# EAGLE board BigBus_Error (EAGLE 7.7.0)
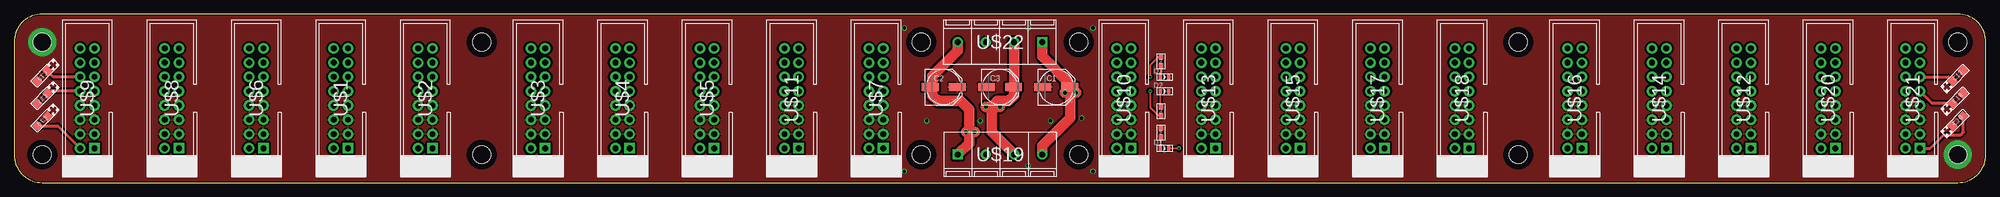
[diagram p0: board, top side]
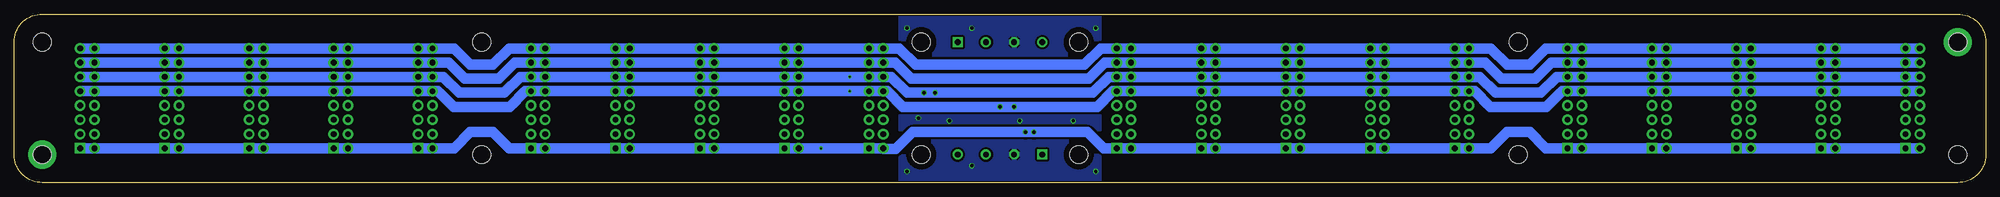
[diagram p1: board, bottom side, seen from below]

Size 350 x 30 mm. Coordinates in mm from the lower left corner, seen from the top.
Outline: 0,25 0,5 arc90 5,0 345,0 arc90 350,5 350,25 arc90 345,30 5,30 arc90 0,25
Copper layers (1*16): Top 0.035mm / dielectric 1.5mm / Bottom 0.035mm
Design rules "dirt_cheap_dirty_boards.v1": minimum track width 5mil, minimum drill 12mil, track to track 5mil, track to pad 5mil, pad to pad 5mil, via to via 5mil, smd to smd 0mil, copper to edge 10mil, drill to drill 10mil, minimum pad ring 10mil, minimum via ring 6mil, stop-mask expansion 2mil, vias tented up to drill 25mil, thermal gap 10mil
Net classes: 0 default: width 0.254 mm, clearance 0.381 mm; 1 Powertrace: width 1.87 mm
Holes 3.2 mm at 5,25 345,5

## Footprints (pad centres in the part's own frame; a part is rotated, then mirrored left to right if it is on the bottom)
PANASONIC_D = smd 3 x 1.4: + 2.4,0; - -2.4,0
CASE-A_3216 = smd 1.27 x 1.27: + -1.27,0; - 1.27,0
LED0603 = smd 0.762 x 0.889: + -0.762,0; - 0.762,0
3.2-NOMARKINGS-SMALLSAFEZONE = hole 3.2: 0,0
R0603 = smd 0.889 x 0.889: 1 -0.762,0; 2 0.762,0
POWER_16_SHROUDED_NOTEXT = drill 1.016 pad 1.88 square: 1 -8.89,-1.27 | drill 1.016 pad 1.88: 2 -8.89,1.27; 3 -6.35,-1.27; 4 -6.35,1.27; 5 -3.81,-1.27; 6 -3.81,1.27; 7 -1.27,-1.27; 8 -1.27,1.27; 9 1.27,-1.27; 10 1.27,1.27; 11 3.81,-1.27; 12 3.81,1.27; 13 6.35,-1.27; 14 6.35,1.27; 15 8.89,-1.27; 16 8.89,1.27
4PIN5MM = drill 1.016 pad 1.778 square: 1 -7.5,0 | drill 1.016 pad 1.778: 2 -2.5,0; 3 2.5,0; 4 7.5,0

## Placement (x,y rotation side)
C1  10uF  [PANASONIC_D]  185,17 0 top
C2  10uF  [PANASONIC_D]  165,17 0 top
C3  10uF  [PANASONIC_D]  175,17 0 top
C10  10uF  [CASE-A_3216]  5,11 225 top
C13  10uF  [CASE-A_3216]  345,19 45 top
C15  10uF  [CASE-A_3216]  5,19 225 top
C18  10uF  [CASE-A_3216]  345,15 45 top
C20  10uF  [CASE-A_3216]  345,11 45 top
C27  10uF  [CASE-A_3216]  5,15 225 top
D1  yellow  [LED0603]  204.21,6.1 0 top
D2  yellow  [LED0603]  204.21,16.26 0 top
D3  yellow  [LED0603]  204.21,18.8 0 top
H1  MOUNT-HOLE  [3.2-NOMARKINGS-SMALLSAFEZONE]  5,5 0 top
H2  MOUNT-HOLE  [3.2-NOMARKINGS-SMALLSAFEZONE]  267,5 0 top
H4  MOUNT-HOLE  [3.2-NOMARKINGS-SMALLSAFEZONE]  267,25 0 top
H5  MOUNT-HOLE  [3.2-NOMARKINGS-SMALLSAFEZONE]  161,25 0 top
H6  MOUNT-HOLE  [3.2-NOMARKINGS-SMALLSAFEZONE]  161,5 0 top
H7  MOUNT-HOLE  [3.2-NOMARKINGS-SMALLSAFEZONE]  83,25 0 top
H8  MOUNT-HOLE  [3.2-NOMARKINGS-SMALLSAFEZONE]  83,5 0 top
H9  MOUNT-HOLE  [3.2-NOMARKINGS-SMALLSAFEZONE]  345,25 0 top
H11  MOUNT-HOLE  [3.2-NOMARKINGS-SMALLSAFEZONE]  189,25 0 top
H12  MOUNT-HOLE  [3.2-NOMARKINGS-SMALLSAFEZONE]  189,5 0 top
R1  680  [R0603]  203.57,8.89 270 top
R2  680  [R0603]  203.57,12.7 90 top
R3  220  [R0603]  203.57,21.59 270 top
U$1  POWER_SHROUDED_NOTEXT  [POWER_16_SHROUDED_NOTEXT]  58,15 90 top
U$2  POWER_SHROUDED_NOTEXT  [POWER_16_SHROUDED_NOTEXT]  73,15 90 top
U$3  POWER_SHROUDED_NOTEXT  [POWER_16_SHROUDED_NOTEXT]  93,15 90 top
U$4  POWER_SHROUDED_NOTEXT  [POWER_16_SHROUDED_NOTEXT]  108,15 90 top
U$5  POWER_SHROUDED_NOTEXT  [POWER_16_SHROUDED_NOTEXT]  123,15 90 top
U$6  POWER_SHROUDED_NOTEXT  [POWER_16_SHROUDED_NOTEXT]  43,15 90 top
U$7  POWER_SHROUDED_NOTEXT  [POWER_16_SHROUDED_NOTEXT]  153,15 90 top
U$8  POWER_SHROUDED_NOTEXT  [POWER_16_SHROUDED_NOTEXT]  28,15 90 top
U$9  POWER_SHROUDED_NOTEXT  [POWER_16_SHROUDED_NOTEXT]  13,15 90 top
U$10  POWER_SHROUDED_NOTEXT  [POWER_16_SHROUDED_NOTEXT]  197,15 90 top
U$11  POWER_SHROUDED_NOTEXT  [POWER_16_SHROUDED_NOTEXT]  138,15 90 top
U$12  POWER_SHROUDED_NOTEXT  [POWER_16_SHROUDED_NOTEXT]  307,15 90 top
U$13  POWER_SHROUDED_NOTEXT  [POWER_16_SHROUDED_NOTEXT]  212,15 90 top
U$14  POWER_SHROUDED_NOTEXT  [POWER_16_SHROUDED_NOTEXT]  292,15 90 top
U$15  POWER_SHROUDED_NOTEXT  [POWER_16_SHROUDED_NOTEXT]  227,15 90 top
U$16  POWER_SHROUDED_NOTEXT  [POWER_16_SHROUDED_NOTEXT]  277,15 90 top
U$17  POWER_SHROUDED_NOTEXT  [POWER_16_SHROUDED_NOTEXT]  242,15 90 top
U$18  POWER_SHROUDED_NOTEXT  [POWER_16_SHROUDED_NOTEXT]  257,15 90 top
U$19  4PIN5MM  [4PIN5MM]  175,5 0 top
U$20  POWER_SHROUDED_NOTEXT  [POWER_16_SHROUDED_NOTEXT]  322,15 90 top
U$21  POWER_SHROUDED_NOTEXT  [POWER_16_SHROUDED_NOTEXT]  337,15 90 top
U$22  4PIN5MM  [4PIN5MM]  175,25 180 top

## Library data of the parts
C1-C3 = SparkFun-Capacitors
C10 C13 C15 C18 C20 C27 U$1-U$22 = EurorackModularParts
D1-D3 R1-R3 = OPL
H1 H2 H4-H9 H11 H12 = zephod-components

## Nets
+5: C1.+ C13.+ C15.+ R3.1 U$1.11 U$1.12 U$2.11 U$2.12 U$3.11 U$3.12 U$4.11 U$4.12 U$5.11 U$5.12 U$6.11 U$6.12 U$7.11 U$7.12 U$8.11 U$8.12 U$9.11 U$9.12 U$10.11 U$10.12 U$11.11 U$11.12 U$12.11 U$12.12 U$13.11 U$13.12 U$14.11 U$14.12 U$15.11 U$15.12 U$16.11 U$16.12 U$17.11 U$17.12 U$18.11 U$18.12 U$19.4 U$20.11 U$20.12 U$21.11 U$21.12 U$22.1
+12: C3.+ C18.+ C27.+ R2.1 U$1.9 U$1.10 U$2.9 U$2.10 U$3.9 U$3.10 U$4.9 U$4.10 U$5.9 U$5.10 U$6.9 U$6.10 U$7.9 U$7.10 U$8.9 U$8.10 U$9.9 U$9.10 U$10.9 U$10.10 U$11.9 U$11.10 U$12.9 U$12.10 U$13.9 U$13.10 U$14.9 U$14.10 U$15.9 U$15.10 U$16.9 U$16.10 U$17.9 U$17.10 U$18.9 U$18.10 U$19.3 U$20.9 U$20.10 U$21.9 U$21.10 U$22.2
-12: C2.- C10.- C20.- D1.- U$1.1 U$1.2 U$2.1 U$2.2 U$3.1 U$3.2 U$4.1 U$4.2 U$5.1 U$5.2 U$6.1 U$6.2 U$7.1 U$7.2 U$8.1 U$8.2 U$9.1 U$9.2 U$10.1 U$10.2 U$11.1 U$11.2 U$12.1 U$12.2 U$13.1 U$13.2 U$14.1 U$14.2 U$15.1 U$15.2 U$16.1 U$16.2 U$17.1 U$17.2 U$18.1 U$18.2 U$19.1 U$20.1 U$20.2 U$21.1 U$21.2 U$22.4
CV: U$1.13 U$1.14 U$2.13 U$2.14 U$3.13 U$3.14 U$4.13 U$4.14 U$5.13 U$5.14 U$6.13 U$6.14 U$7.13 U$7.14 U$8.13 U$8.14 U$9.13 U$9.14 U$10.13 U$10.14 U$11.13 U$11.14 U$12.13 U$12.14 U$13.13 U$13.14 U$14.13 U$14.14 U$15.13 U$15.14 U$16.13 U$16.14 U$17.13 U$17.14 U$18.13 U$18.14 U$20.13 U$20.14 U$21.13 U$21.14
GATE: U$1.15 U$1.16 U$2.15 U$2.16 U$3.15 U$3.16 U$4.15 U$4.16 U$5.15 U$5.16 U$6.15 U$6.16 U$7.15 U$7.16 U$8.15 U$8.16 U$9.15 U$9.16 U$10.15 U$10.16 U$11.15 U$11.16 U$12.15 U$12.16 U$13.15 U$13.16 U$14.15 U$14.16 U$15.15 U$15.16 U$16.15 U$16.16 U$17.15 U$17.16 U$18.15 U$18.16 U$20.15 U$20.16 U$21.15 U$21.16
GND: C1.- C2.+ C3.- C10.+ C13.- C15.- C18.- C20.+ C27.- D2.- D3.- R1.1 U$1.3 U$1.4 U$1.5 U$1.6 U$1.7 U$1.8 U$2.3 U$2.4 U$2.5 U$2.6 U$2.7 U$2.8 U$3.3 U$3.4 U$3.5 U$3.6 U$3.7 U$3.8 U$4.3 U$4.4 U$4.5 U$4.6 U$4.7 U$4.8 U$5.3 U$5.4 U$5.5 U$5.6 U$5.7 U$5.8 U$6.3 U$6.4 U$6.5 U$6.6 U$6.7 U$6.8 U$7.3 U$7.4 U$7.5 U$7.6 U$7.7 U$7.8 U$8.3 U$8.4 U$8.5 U$8.6 U$8.7 U$8.8 U$9.3 U$9.4 U$9.5 U$9.6 U$9.7 U$9.8 U$10.3 U$10.4 U$10.5 U$10.6 U$10.7 U$10.8 U$11.3 U$11.4 U$11.5 U$11.6 U$11.7 U$11.8 U$12.3 U$12.4 U$12.5 U$12.6 U$12.7 U$12.8 U$13.3 U$13.4 U$13.5 U$13.6 U$13.7 U$13.8 U$14.3 U$14.4 U$14.5 U$14.6 U$14.7 U$14.8 U$15.3 U$15.4 U$15.5 U$15.6 U$15.7 U$15.8 U$16.3 U$16.4 U$16.5 U$16.6 U$16.7 U$16.8 U$17.3 U$17.4 U$17.5 U$17.6 U$17.7 U$17.8 U$18.3 U$18.4 U$18.5 U$18.6 U$18.7 U$18.8 U$19.2 U$20.3 U$20.4 U$20.5 U$20.6 U$20.7 U$20.8 U$21.3 U$21.4 U$21.5 U$21.6 U$21.7 U$21.8 U$22.3
N$1: D1.+ R1.2
N$2: D2.+ R2.2
N$3: D3.+ R3.2

## Tracks (layer width: path | path; a pad name or v marks a point on that pad's centre or on a via)
+5  (via drill 0.3, 0.61)
  Top 0.254: R3.1 203.07,22.35 201.67,20.95 v201.67,18.81
  Top 0.508: v186.5,16 187.4,16.9 C1.+ 187.4,16.6 187.5,16.5 | U$9.12 6.99,18.81 C15.+ | U$21.11 343.39,18.81 C13.+
  Top 1.87: U$22.1 182.5,22.5 187.5,17.5 187.5,16.5 187.5,11.5 182.5,6.5 U$19.4 | v188.5,16 v186.5,16
  Bottom 1.87: U$21.11 U$21.12 U$20.11 U$20.12 U$12.11 U$12.12 U$14.11 U$14.12 U$16.11 U$16.12 | U$18.11 U$18.12 U$17.11 U$17.12 U$15.11 U$15.12 U$13.11 U$13.12 v201.67,18.81 U$10.11 U$10.12 194.31,18.81 191.5,16 v188.5,16 v186.5,16 158.5,16 155.69,18.81 U$7.11 U$7.12 U$11.11 U$11.12 U$5.11 U$5.12 U$4.11 U$4.12 U$3.11 92.5,18.81 U$3.12 | U$9.12 U$9.11 U$8.12 U$8.11 U$6.12 U$6.11 U$1.12 U$1.11 U$2.12 U$2.11
  Bottom 1.88: U$2.11 76.19,18.81 79,16 87,16 89.81,18.81 92.5,18.81 | U$18.11 260.19,18.81 263,16 271,16 273.81,18.81 U$16.12
+12  (via drill 0.3, 0.61)
  Top 0.254: R2.1 203.07,11.94 201.67,13.34 v201.67,16.27
  Top 0.508: C3.+ 177.4,16.1 177.5,16 | U$9.10 6.27,16.27 C27.+ | C18.+ 340.44,14.1 U$21.9
  Top 1.87: U$22.2 177.5,16 177.5,15.5 176.5,14.5 174.5,14.5 173.5,13.5 | 173.5,13.5 173.5,9 U$19.3 | 173.5,13.5 v172.5,13.5 v175,13.5
  Bottom 1.87: U$21.9 U$21.10 U$20.9 U$20.10 U$12.9 U$12.10 U$14.9 U$14.10 U$16.9 U$16.10 | U$18.9 U$18.10 U$17.9 U$17.10 U$15.9 U$15.10 U$13.9 U$13.10 v201.67,16.27 U$10.9 U$10.10 195.02,16.27 192.25,13.5 v175,13.5 v172.5,13.5 157.75,13.5 154.98,16.27 U$7.9 U$7.10 U$11.9 U$11.10 U$5.9 U$5.10 U$4.9 U$4.10 U$3.9 U$3.10 | U$9.10 U$9.9 U$8.10 U$8.9 U$6.10 U$6.9 U$1.10 U$1.9 U$2.10 U$2.9
  Bottom 1.88: U$2.9 75.23,16.27 78,13.5 88,13.5 90.77,16.27 U$3.10 | U$18.9 259.23,16.27 262,13.5 272,13.5 274.77,16.27 U$16.10
-12  (via drill 0.3, 0.61)
  Top 0.254: D1.- 206.74,6.1 v206.75,6.11
  Top 0.508: 169.5,10.5 169.24,10.24 169,10.24 v169,9 | C10.- 7.74,10.1 U$9.2 | U$21.1 340.11,6.11 342.5,8.5 345.5,8.5 346,9 346,11.8 C20.- | 163,15.5 163,16.6 C2.-
  Top 1.87: U$22.4 167.5,23.5 163,19 163,15.5 164,14.5 168,14.5 169.5,13 169.5,10.5 169.5,7 U$19.1 | v169,9 v170.5,9
  Bottom 1: 195.62,6 U$10.2
  Bottom 1.87: U$16.2 U$16.1 U$14.2 U$14.1 U$12.2 U$12.1 U$20.2 U$20.1 U$21.2 U$21.1 | U$18.1 U$18.2 U$17.1 U$17.2 U$15.1 U$15.2 U$13.1 U$13.2 v206.75,6.11 U$10.1 U$10.2 | U$2.1 U$2.2 U$1.1 U$1.2 U$6.1 U$6.2 U$8.1 U$8.2 U$9.1 U$9.2 | U$3.2 U$3.1 U$4.2 U$4.1 U$5.2 U$5.1 U$11.2 U$11.1 U$7.2 U$7.1 156.61,6.11 159.5,9 v169,9 v170.5,9 190.5,9 193.5,6 195.62,6
  Bottom 1.88: U$2.1 78.11,6.11 81,9 85,9 87.89,6.11 U$3.2 | U$18.1 262.11,6.11 265,9 269,9 271.89,6.11 U$16.2
CV
  Bottom 1.87: U$9.14 U$9.13 U$8.14 U$8.13 U$6.14 U$6.13 U$1.14 U$1.13 U$2.14 U$2.13 | U$21.13 U$21.14 U$20.13 U$20.14 U$12.13 U$12.14 U$14.13 U$14.14 U$16.13 U$16.14 | U$18.13 U$18.14 U$17.13 U$17.14 U$15.13 U$15.14 U$13.13 U$13.14 U$10.13 U$10.14 193.6,21.35 190.75,18.5 159.25,18.5 156.4,21.35 U$7.13 U$7.14 U$11.13 U$11.14 U$5.13 U$5.14 U$4.13 U$4.14 U$3.13 92.5,21.35 U$3.14
  Bottom 1.88: U$2.13 77.15,21.35 80,18.5 86,18.5 88.85,21.35 92.5,21.35 | U$18.13 261.15,21.35 264,18.5 270,18.5 272.85,21.35 U$16.14
GATE
  Bottom 1.87: U$9.16 U$9.15 U$8.16 U$8.15 U$6.16 U$6.15 U$1.16 U$1.15 U$2.16 U$2.15 | U$18.15 U$18.16 U$17.15 U$17.16 U$15.15 U$15.16 U$13.15 U$13.16 U$10.15 U$10.16 192.88,23.89 189.99,21 160.01,21 157.12,23.89 U$7.15 U$7.16 U$11.15 U$11.16 U$5.15 U$5.16 U$4.15 U$4.16 U$3.15 U$3.16 | U$16.16 276.5,23.89 U$16.15 U$14.16 U$14.15 U$12.16 U$12.15 U$20.16 U$20.15 U$21.16 U$21.15
  Bottom 1.88: U$2.15 78.11,23.89 81,21 85,21 87.89,23.89 U$3.16 | U$18.15 262.11,23.89 265,21 269,21 271.89,23.89 276.5,23.89
GND  (via drill 0.61, 3.2 pad 5)
  other vias: 158,27.5 162,11 158,2 171.5,11 184,11 189.5,11.5 191.5,27.5 180,27.5 180,3 191.5,2 5,25 345,5
  pour Top: 0,31 345,30 arc-90 350,25 350,0 5,0 arc-90 0,5
  pour Bottom: 157.5,30 192.5,30 192.5,0 157.5,0
N$1
  Top 0.254: D1.+ 203.45,8 R1.2
N$2
  Top 0.254: D2.+ 203.45,13.59 R2.2
N$3
  Top 0.254: R3.2 203.57,18.54 D3.+